# Altium PCB PA_CPLBridge_R00.PcbDoc
Units mm, origin at the board's own origin, x right, y up, seen from the top; angles counter-clockwise.
Board outline 30 x 20 mm, 2 copper layers (Top Layer, Bottom Layer); 6 components, 0 nets, 24 pads, 0 vias.
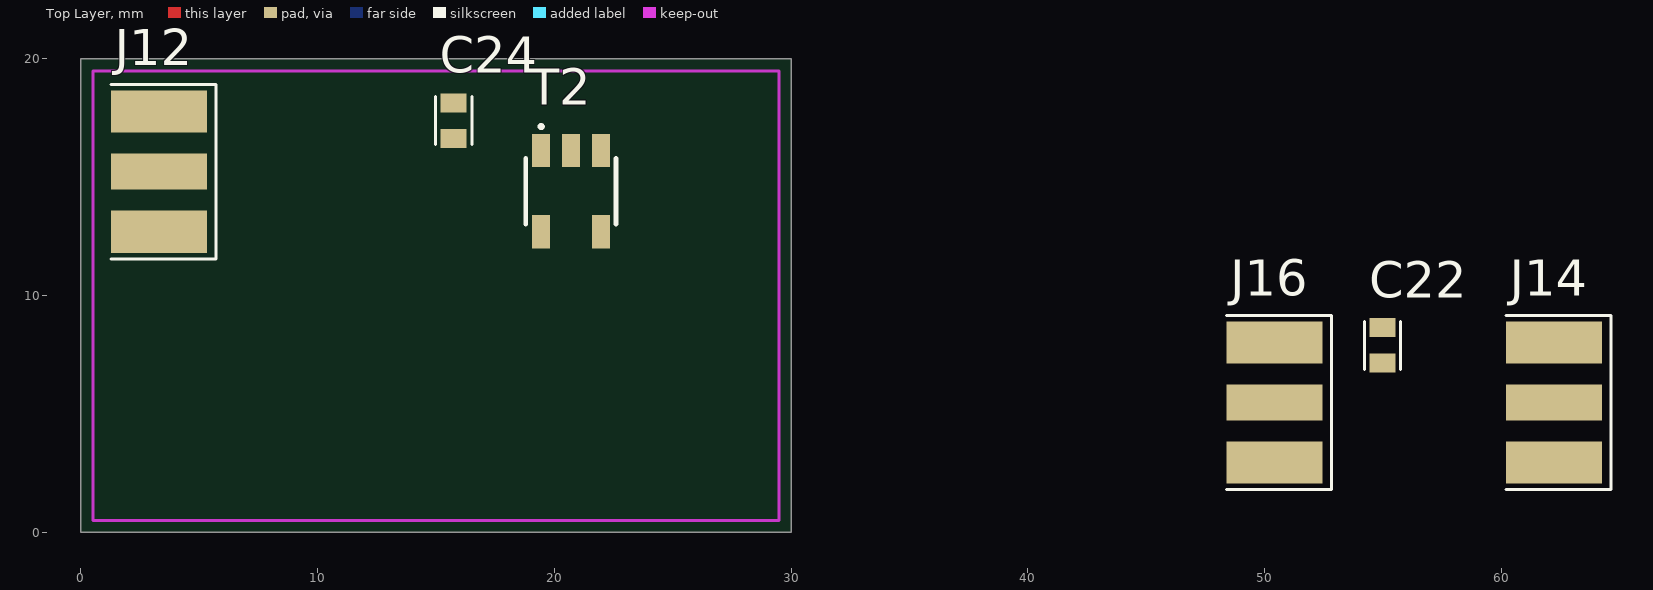
[diagram p0: Top Layer view]
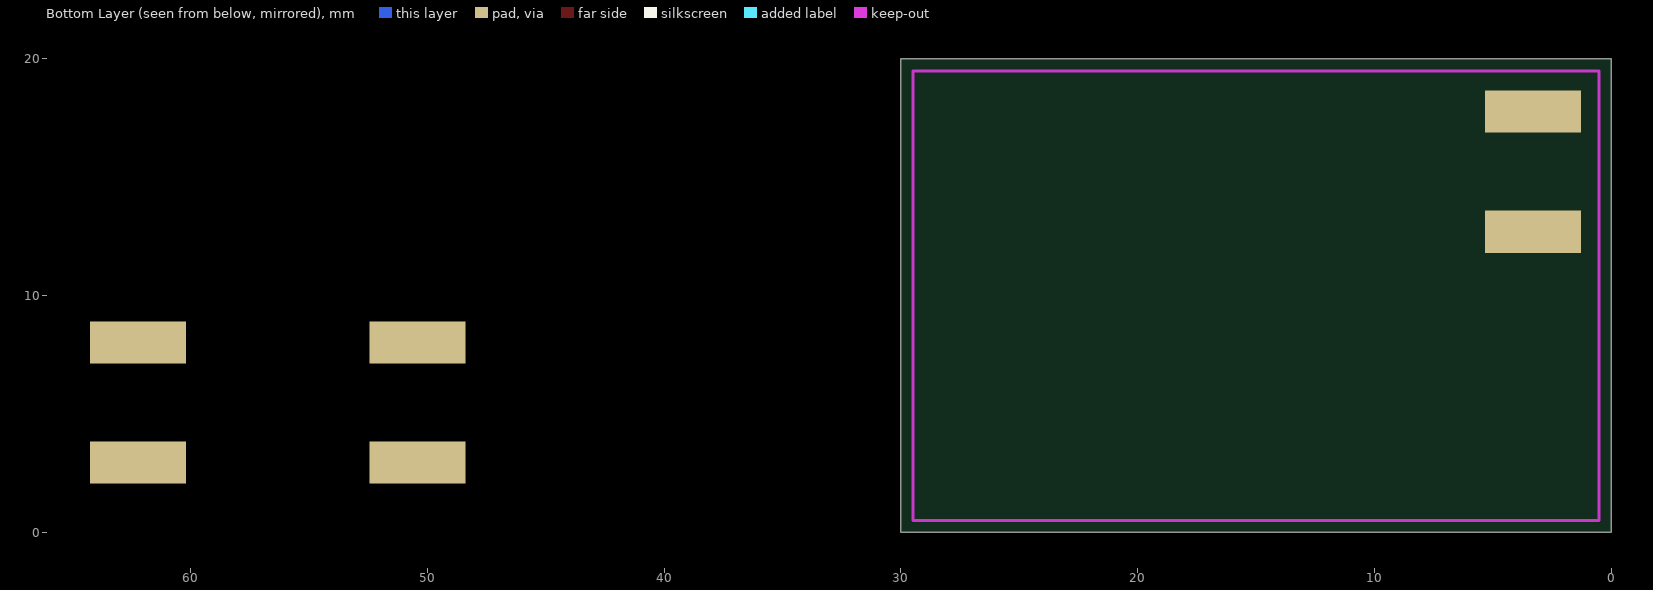
[diagram p1: Bottom Layer view, seen from below]

## Layer stack, top to bottom
Top Solder: solder mask 0.0102, Solder Resist, Dk 3.5
Top Layer: signal copper 0.0356
Dielectric 1: dielectric 0.32, FR-4, Dk 4.8
Bottom Layer: signal copper 0.0356
Bottom Solder: solder mask 0.0102, Solder Resist, Dk 3.5

## Board outline
0,0 0,20 30,20 30,0

## Design rules (kind name [scope] priority, off if disabled: settings)
Clearance [All] p1: gap=0.254 ignorepadtopadclearanceinfootprint=FALSE
PolygonConnect [All] p1: connectstyle=Relief reliefconductorwidth=0.254 reliefentries=4 polygonreliefangle="90 Angle" airgapwidth=0.254
RoutingVias [All] p1: holewidth=0.711 width=1.27 viastyle="Through Hole" minholewidth=0.711 minwidth=1.27 maxholewidth=0.711 maxwidth=1.27
SolderMaskExpansion [All] p1: expansion=0.102 istentingtop=FALSE
Width [All] p1: maxlimit=0.254 minlimit=0.254 preferedwidth=0.254
30 further rules are at their usual default settings.

## Components (designator, comment, footprint, x,y, rotation, side; value= is the part's Value field where it differs from the comment)
C22 "100nF - RF" C_0603 54.991,7.902 r90 top
C24 "100nF - RF" C_0603 15.748,17.399 r90 top
J12 "SMA_Connector" SMA_Connector 3.302,15.24 r90 top
J14 "SMA_Connector" SMA_Connector 62.23,5.489 r90 top
J16 "SMA_Connector" SMA_Connector 50.419,5.489 r90 top
T2 "MABA-007159-000000" MABA-007159-000000_1 20.701,14.415 r0 top

## Footprints (in the part's own frame and the unit in brackets; to place one, negate y for a bottom-side part, rotate by r counter-clockwise, add the part's x,y. Pads: shape width x height; smd on the part's side, far side on the other; paste and mask are expansions set on the pad)
C_0603 [mm] "Chip Capacitor, 2-Leads,"
  rect 0.8x1.1 smd: 1(-0.75,0) 2(0.75,0)
  silkscreen extent -1.02,-0.76 1.02,0.76, body extent -1,-0.62 1,0.63, height 0.78
MABA-007159-000000_1 [mm]
  rect 0.76x1.4 smd: 1(-1.27,1.715) 2(0,1.715) 3(1.27,1.715) 4(1.27,-1.715) 5(-1.27,-1.715)
  silkscreen extent -1.91,-1.4 1.91,2.78, body extent -1.91,-1.91 1.91,1.91, height 2.6
SMA_Connector [mil] "SMA PCB Connector 1.6mm / PN: EMPCB.CSMAFSTJ.A"
  rect 60x160 smd: 1(0,0)
  rect 70x160 smd: 2(-100,0) 2(100,0)
  rect 70x160 smd far side: 2(-100,0) 2(100,0)
  silkscreen extent -145,-95 145,80, body extent -121,-60 121,80, height 10

## Part data
C22 C24: library part "Ceramic Cap"
J12 J14 J16: "Connector SMA"
T2: "Transformer", Manufacturer_Name=MACOM, Mouser Part Number=937-MABA007159000000, Datasheet Link=http://cdn.macom.com/datasheets/MABA-007159-000000.pdf, Manufacturer_Part_Number=MABA-007159-000000, Mouser Price/Stock=https://www.mouser.co.uk/ProductDetail/MACOM/MABA-007159-000000?qs=3Wmz%2FrCSAaFBkdkj62uXUA%3D%3D

## Nets (pads, with @x,y where several pads share a name; then routed paths per layer and width w, separated by ;. In a path a pad name is that pad's centre, name@x,y a point inside that pad or via, vN(x,y) a via of type N, cw(c..) or ccw(c..) an arc to the next point about the centre after c; other vN are vias at no path point)
pads on no net: C22.1 C22.2 C24.1 C24.2 J12.1 J12.2 J14.1 J14.2 J16.1 J16.2 T2.1 T2.2 T2.3 T2.4 T2.5

## Keep-outs
Keep-Out Layer:
  lines w0.127: 0.5,0.5 29.5,0.5 29.5,19.5 0.5,19.5 0.5,0.5

## Silkscreen, mask and mechanical layers (free items; w line width, h text height)
Mechanical 1:
  the board outline again, w0.254